# EAGLE board ButtonBreakout (EAGLE 9.5.1)
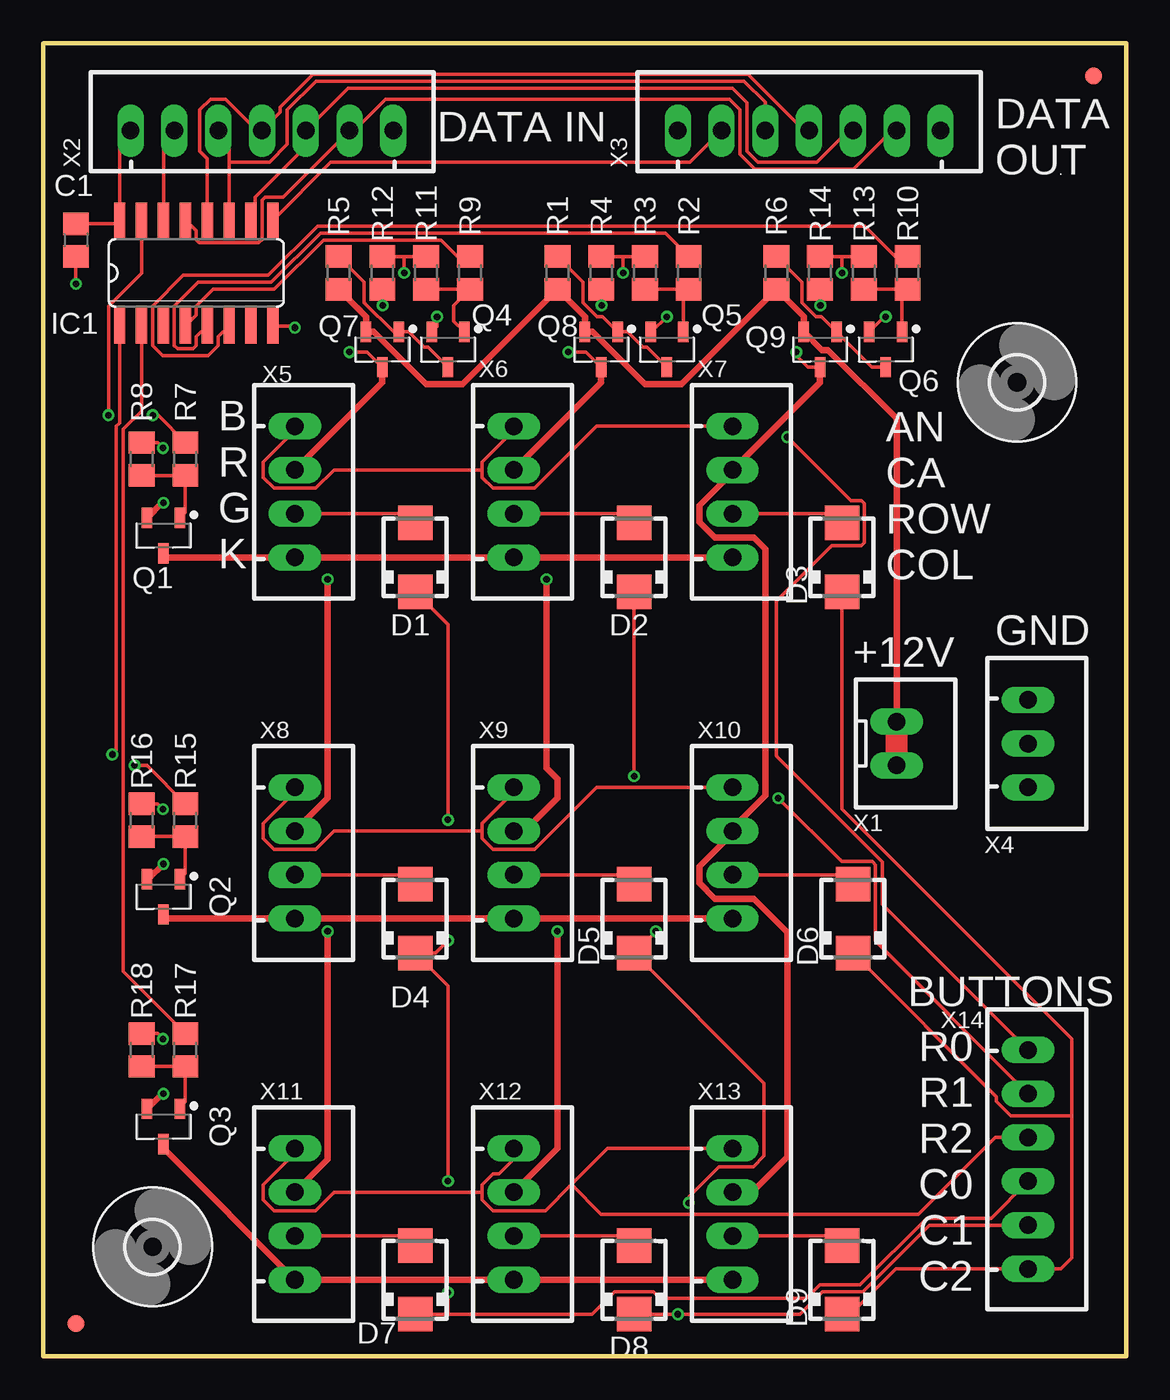
[diagram p0: board, top side]
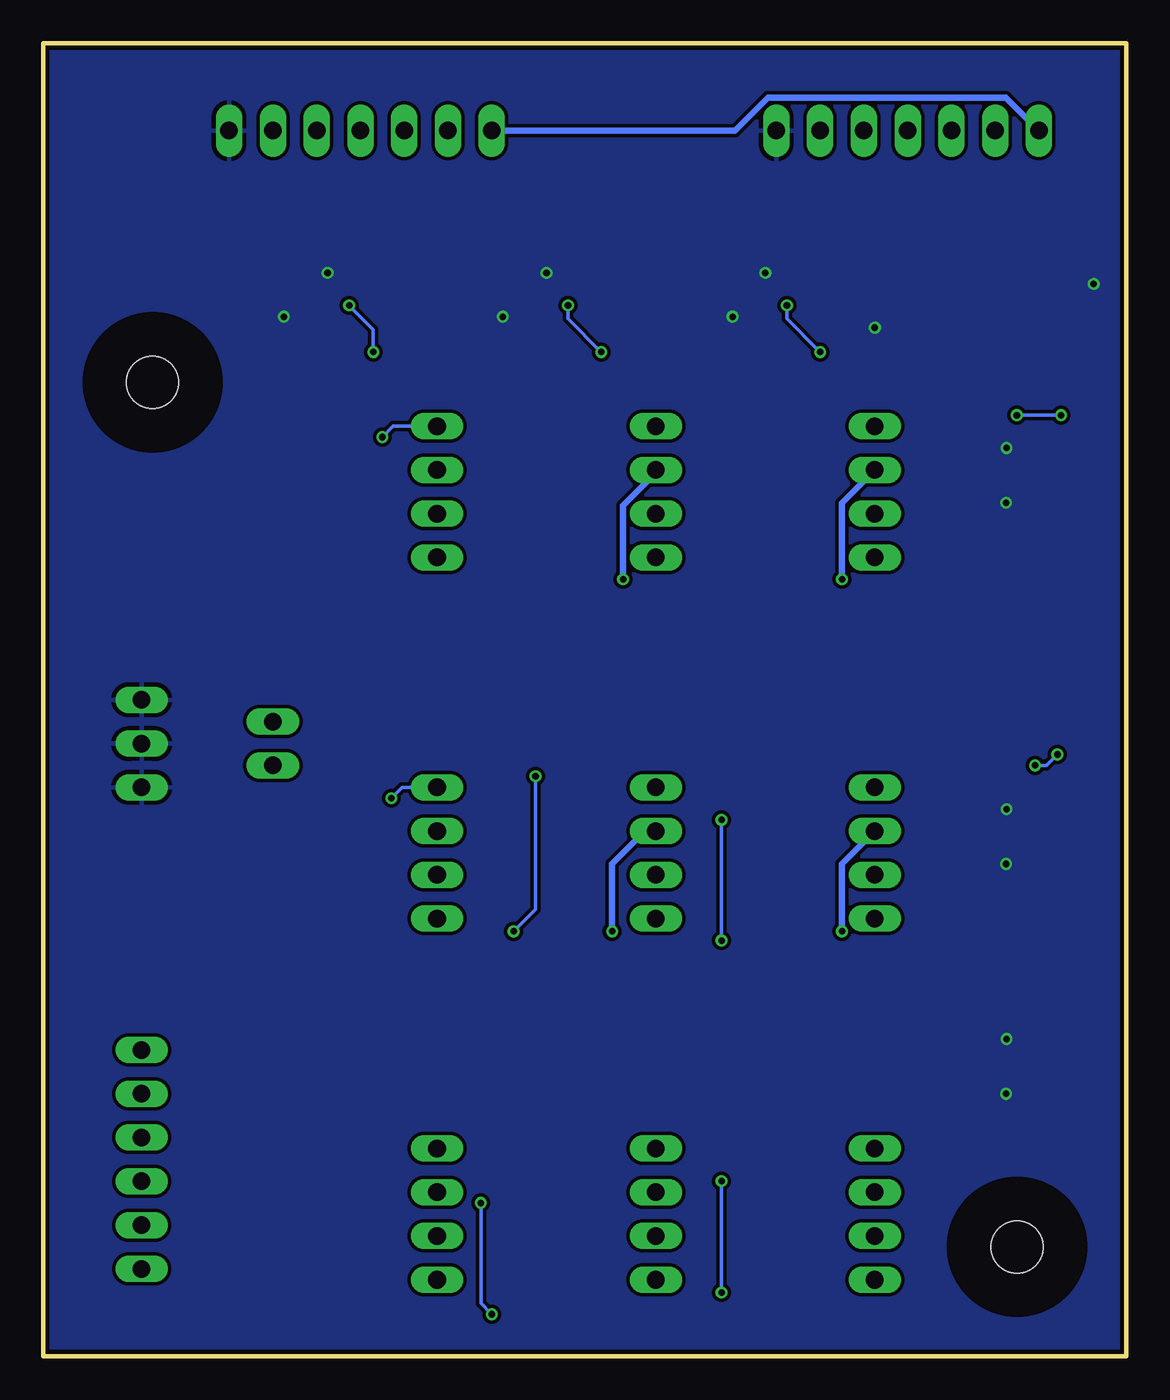
[diagram p1: board, bottom side, seen from below]

Size 62.87 x 76.2 mm. Coordinates in mm from the lower left corner, seen from the top.
Outline: 0,0 62.87,0 62.87,76.2 0,76.2 0,0
Copper layers (1*16): Top 0.035mm / dielectric 1.5mm / Bottom 0.035mm
Design rules "Dirty8TS": minimum track width 8mil, minimum drill 15mil, track to track 8mil, track to pad 8mil, pad to pad 8mil, via to via 8mil, smd to smd 0mil, copper to edge 10mil, drill to drill 10mil, minimum pad ring 10mil, minimum via ring 6mil, stop-mask expansion 2mil, vias tented up to drill 25mil, thermal gap 10mil

## Footprints (pad centres in the part's own frame; a part is rotated, then mirrored left to right if it is on the bottom)
C0805 = smd 1.3 x 1.5: 1 -0.95,0; 2 0.95,0
SMA = smd 2 x 2: A 2,0; C -2,0
FIDUCIAL_1MM = smd 1 x 1: 1 0,0
3,0 = hole 3: 0,0
SO16 = smd 0.66 x 2.032: 1 -4.445,-3.073; 2 -3.175,-3.073; 3 -1.905,-3.073; 4 -0.635,-3.073; 5 0.635,-3.073; 6 1.905,-3.073; 7 3.175,-3.073; 8 4.445,-3.073; 9 4.445,3.073; 10 3.175,3.073; 11 1.905,3.073; 12 0.635,3.073; 13 -0.635,3.073; 14 -1.905,3.073; 15 -3.175,3.073; 16 -4.445,3.073
SOT95P240X110-3N = smd 1.18 x 0.609: 1 -1.024,0.95; 2 -1.024,-0.95; 3 1.024,0
R0805 = smd 1.3 x 1.5: 1 -0.95,0; 2 0.95,0
JST-XH-02-PACKAGE-LONG-PAD = drill 1.016 long: 1 -1.27,0; 2 1.27,0
JST-XH-07-PACKAGE-LONG-PAD = drill 1.016 long: 1 -7.62,0; 2 -5.08,0; 3 -2.54,0; 4 0,0; 5 2.54,0; 6 5.08,0; 7 7.62,0
JST-XH-03-PACKAGE-LONG-PAD = drill 1.016 long: 1 -2.54,0; 2 0,0; 3 2.54,0
JST-XH-04-PACKAGE-LONG-PAD = drill 1.016 long: 1 -3.81,0; 2 -1.27,0; 3 1.27,0; 4 3.81,0
JST-XH-06-PACKAGE-LONG-PAD = drill 1.016 long: 1 -6.35,0; 2 -3.81,0; 3 -1.27,0; 4 1.27,0; 5 3.81,0; 6 6.35,0

## Placement (x,y rotation side)
C1  0.1uF  [C0805]  1.91,64.77 270 top
D1  SS34  [SMA]  21.59,46.35 90 top
D2  SS34  [SMA]  34.29,46.35 90 top
D3  SS34  [SMA]  46.35,46.35 90 top
D4  SS34  [SMA]  21.59,25.4 90 top
D5  SS34  [SMA]  34.29,25.4 90 top
D6  SS34  [SMA]  46.99,25.4 90 top
D7  SS34  [SMA]  21.59,4.45 90 top
D8  SS34  [SMA]  34.29,4.45 90 top
D9  SS34  [SMA]  46.35,4.45 90 top
F1  FIDUCIAL  [FIDUCIAL_1MM]  1.91,1.91 0 top
F2  FIDUCIAL  [FIDUCIAL_1MM]  60.96,74.3 0 top
H1  MOUNT-HOLE3.0  [3,0]  6.35,6.35 0 top
H2  MOUNT-HOLE3.0  [3,0]  56.52,56.52 0 top
IC1  74HC595D  [SO16]  8.89,62.87 0 top
Q1  AO3414SOT23  [SOT95P240X110-3N]  6.99,47.62 270 top
Q2  AO3414SOT23  [SOT95P240X110-3N]  6.99,26.67 270 top
Q3  AO3414SOT23  [SOT95P240X110-3N]  6.99,13.34 270 top
Q4  AO3414SOT23  [SOT95P240X110-3N]  23.5,58.42 270 top
Q5  AO3414SOT23  [SOT95P240X110-3N]  36.2,58.42 270 top
Q6  AO3414SOT23  [SOT95P240X110-3N]  48.9,58.42 270 top
Q7  AO3415  [SOT95P240X110-3N]  19.68,58.42 270 top
Q8  AO3415  [SOT95P240X110-3N]  32.38,58.42 270 top
Q9  AO3415  [SOT95P240X110-3N]  45.09,58.42 270 top
R1  1K  [R0805]  29.84,62.87 270 top
R2  1K  [R0805]  37.47,62.87 270 top
R3  10K  [R0805]  34.92,62.87 270 top
R4  10K  [R0805]  32.38,62.87 270 top
R5  1K  [R0805]  17.14,62.87 270 top
R6  1K  [R0805]  42.55,62.87 270 top
R7  1K  [R0805]  8.26,52.07 270 top
R8  10K  [R0805]  5.71,52.07 270 top
R9  1K  [R0805]  24.77,62.87 270 top
R10  1K  [R0805]  50.16,62.87 270 top
R11  10K  [R0805]  22.23,62.87 270 top
R12  10K  [R0805]  19.68,62.87 270 top
R13  10K  [R0805]  47.62,62.87 270 top
R14  10K  [R0805]  45.09,62.87 270 top
R15  1K  [R0805]  8.26,31.11 270 top
R16  10K  [R0805]  5.71,31.11 270 top
R17  1K  [R0805]  8.26,17.78 270 top
R18  10K  [R0805]  5.71,17.78 270 top
X1  JST-XH-02-PIN-LONG-PAD  [JST-XH-02-PACKAGE-LONG-PAD]  49.53,35.56 270 top
X2  JST-XH-07-PIN-LONG-PAD  [JST-XH-07-PACKAGE-LONG-PAD]  12.7,71.12 0 top
X3  JST-XH-07-PIN-LONG-PAD  [JST-XH-07-PACKAGE-LONG-PAD]  44.45,71.12 0 top
X4  JST-XH-03-PIN-LONG-PAD  [JST-XH-03-PACKAGE-LONG-PAD]  57.15,35.56 270 top
X5  JST-XH-04-PIN-LONG-PAD  [JST-XH-04-PACKAGE-LONG-PAD]  14.61,50.16 270 top
X6  JST-XH-04-PIN-LONG-PAD  [JST-XH-04-PACKAGE-LONG-PAD]  27.3,50.16 270 top
X7  JST-XH-04-PIN-LONG-PAD  [JST-XH-04-PACKAGE-LONG-PAD]  40.01,50.16 270 top
X8  JST-XH-04-PIN-LONG-PAD  [JST-XH-04-PACKAGE-LONG-PAD]  14.61,29.21 270 top
X9  JST-XH-04-PIN-LONG-PAD  [JST-XH-04-PACKAGE-LONG-PAD]  27.3,29.21 270 top
X10  JST-XH-04-PIN-LONG-PAD  [JST-XH-04-PACKAGE-LONG-PAD]  40.01,29.21 270 top
X11  JST-XH-04-PIN-LONG-PAD  [JST-XH-04-PACKAGE-LONG-PAD]  14.61,8.26 270 top
X12  JST-XH-04-PIN-LONG-PAD  [JST-XH-04-PACKAGE-LONG-PAD]  27.3,8.26 270 top
X13  JST-XH-04-PIN-LONG-PAD  [JST-XH-04-PACKAGE-LONG-PAD]  40.01,8.26 270 top
X14  JST-XH-06-PIN-LONG-PAD  [JST-XH-06-PACKAGE-LONG-PAD]  57.15,11.43 270 top

## Library data of the parts
C1 = rcl; SPICEPREFIX: C
D1-D9 Q1-Q9 = tmc
F1 F2 = ECE388
H1 H2 = holes
IC1 = 74xx-eu
R1-R18 = rcl; SPICEPREFIX: R
X1-X14 = Rembrandt Electronics - JST XH Connectors v1-0

## Nets
+5V: C1.1 IC1.16 X2.1 X3.1
+12V: Q7.2 Q8.2 Q9.2 R1.2 R5.2 R6.2 X1.1 X1.2
ANODE0: Q7.3 R12.2 X5.2 X8.2 X11.2
ANODE1: Q8.3 R4.2 X6.2 X9.2 X12.2
ANODE2: Q9.3 R14.2 X7.2 X10.2 X13.2
B_COL0: D1.C D4.C D7.C X14.4
B_COL1: D2.C D5.C D8.C X14.5
B_COL2: D3.C D6.C D9.C X14.6
B_ROW0: X5.1 X6.1 X7.1 X14.1
B_ROW1: X8.1 X9.1 X10.1 X14.2
B_ROW2: X11.1 X12.1 X13.1 X14.3
BLANK: IC1.10 X2.5 X3.5
CATHODE0: Q1.3 X5.4 X6.4 X7.4
CATHODE1: Q2.3 X8.4 X9.4 X10.4
CATHODE2: Q3.3 X11.4 X12.4 X13.4
CLOCK: IC1.11 X2.3 X3.3
DATA_IN: IC1.14 X2.2
DATA_OUT: IC1.9 X3.2
GND: C1.2 IC1.8 Q1.2 Q2.2 Q3.2 Q4.2 Q5.2 Q6.2 R3.1 R4.1 R8.1 R11.1 R12.1 R13.1 R14.1 R16.1 R18.1 X2.7 X3.7 X4.1 X4.2 X4.3
LATCH: IC1.12 X2.4 X3.4
LCOL0: IC1.4 R9.1
LCOL1: IC1.5 R2.1
LCOL2: IC1.6 R10.1
LROW0: IC1.15 R7.1
LROW1: IC1.1 R15.1
LROW2: IC1.2 R17.1
N$1: Q2.1 R15.2 R16.2
N$2: Q3.1 R17.2 R18.2
N$3: Q5.3 Q8.1 R1.1
N$4: Q5.1 R2.2 R3.2
N$5: Q1.1 R7.2 R8.2
N$6: Q4.3 Q7.1 R5.1
N$7: D1.A X5.3
N$8: D2.A X6.3
N$9: D3.A X7.3
N$10: D4.A X8.3
N$11: D5.A X9.3
N$12: D6.A X10.3
N$13: D7.A X11.3
N$14: D8.A X12.3
N$15: D9.A X13.3
N$16: Q4.1 R9.2 R11.2
N$17: Q6.3 Q9.1 R6.1
N$18: Q6.1 R10.2 R13.2
OEN: IC1.13 X2.6 X3.6

## Tracks (layer width: path | path; a pad name or v marks a point on that pad's centre or on a via)
+5V
  Top 0.203: X2.1 4.45,70.48 IC1.16 4.23,65.72 C1.1
  Bottom 0.381: X3.1 22.72,71.12 22.15,71.68 20.8,73.04 7,73.04 X2.1
+12V
  Top 0.381: R5.2 18.73,60.33 Q7.2 19.18,59.44 22.22,56.41 24.34,56.41 R1.2 31.43,60.33 Q8.2 31.88,59.44 34.92,56.41 37.04,56.41 R6.2 44.13,60.33 Q9.2 45.2,58.38 45.55,58.38 49.53,54.4 X1.1
  Top 1.27: X1.2 X1.1
ANODE0  (via drill 0.38)
  Top 0.203: v19.7,60.98 19.68,61 R12.2 | Q7.3 18.81,58.27 v17.78,58.27
  Top 0.381: v16.51,45.09 16.51,33.51 16.52,33.5 16.52,32.4 X8.2 | v16.51,24.66 16.51,12.56 16.52,12.54 16.52,11.44 X11.2 | Q7.3 19.68,56.52 X5.2
  Bottom 0.203: v17.78,58.27 19.7,60.2 v19.7,60.98
  Bottom 0.381: v16.51,45.09 16.51,45.86 16.52,45.88 16.52,49.52 X5.2 | v16.51,24.66 16.51,24.91 16.52,24.92 16.52,28.56 X8.2
ANODE1  (via drill 0.38)
  Top 0.203: v32.41,60.98 32.38,61 R4.2 | Q8.3 31.51,58.27 v30.48,58.27
  Top 0.381: v29.21,45.09 29.21,34.15 29.86,33.5 29.86,32.4 27.94,30.48 X9.2 | v29.84,24.66 29.84,12.56 29.86,12.54 29.86,12.08 X12.2 | Q8.3 32.38,56.52 X6.2
  Bottom 0.203: v30.48,58.27 32.41,60.2 v32.41,60.98
  Bottom 0.381: X6.2 27.3,51.29 29.22,49.37 29.22,45.88 29.21,45.86 v29.21,45.09 | v29.84,24.66 29.86,24.68 29.86,28.56 27.94,30.48 X9.2
ANODE2  (via drill 0.38)
  Top 0.203: v45.1,60.98 45.09,61 R14.2 | Q9.3 44.37,57.4 43.7,58.07 v43.7,58.27
  Top 0.381: X13.2 41.13,9.53 43.19,11.59 43.19,24.61 41.25,26.56 38.99,26.56 38.09,27.46 38.09,28.42 40.01,30.34 X10.2 40.01,30.62 41.92,32.54 41.92,46.83 41.25,47.51 38.99,47.51 38.09,48.42 38.09,49.37 40.01,51.29 X7.2 45.09,56.52 Q9.3
  Bottom 0.203: v43.7,58.27 43.7,59.58 v45.1,60.98
B_COL0  (via drill 0.38)
  Top 0.203: X14.4 55.02,8.03 51.27,8.03 47.4,4.16 45.06,4.16 44.28,3.38 35.79,3.38 35.42,3.75 33.16,3.75 31.86,2.44 23.5,2.44 | 23.5,2.44 D7.C | v23.5,10.17 23.5,21.5 D4.C 22.77,23.4 v23.5,24.13 | v23.5,3.71 23.5,2.44 | D1.C 23.5,42.45 v23.5,31.13
  Bottom 0.203: v23.5,10.17 v23.5,3.71 | v23.5,31.13 v23.5,24.13
B_COL1  (via drill 0.38)
  Top 0.203: X14.5 51.44,7.62 47.56,3.75 45.23,3.75 43.92,2.44 v36.83,2.44 D8.C | v37.47,8.9 37.47,9.26 39.21,11 41.21,11 41.83,11.62 41.83,15.86 D5.C v35.56,24.66 | D2.C v34.29,33.67
  Bottom 0.203: v37.47,8.9 37.47,3.08 v36.83,2.44 | v34.29,33.67 34.29,25.93 v35.56,24.66
B_COL2
  Top 0.203: D9.C 46.84,2.44 49.48,5.08 X14.6 59.05,5.08 59.69,5.71 59.69,13.97 | D3.C 46.35,31.75 59.69,18.41 59.69,13.97 | D6.C 55.32,15.07 55.32,14.8 56.15,13.97 59.69,13.97
B_ROW0  (via drill 0.38)
  Top 0.203: 25.48,51.44 25.48,50.99 26.1,50.37 28.51,50.37 32.12,53.98 X7.1 | 25.48,51.44 25.48,51.88 27.3,53.71 X6.1 | X5.1 14.61,53.71 12.78,51.88 12.78,50.99 13.4,50.37 15.81,50.37 16.88,51.44 25.48,51.44 | X14.1 48.7,26.23 48.7,28.7 42.55,34.85 42.55,43.81 45.78,47.05 47.48,47.05 47.66,47.23 47.66,49.48 47.48,49.66 46.86,49.66 v43.18,53.34
  Bottom 0.203: X7.1 42.55,53.98 v43.18,53.34
B_ROW1  (via drill 0.38)
  Top 0.203: X10.1 32.12,33.02 28.51,29.41 26.1,29.41 25.48,30.04 25.48,30.48 | X8.1 14.61,32.75 12.78,30.92 12.78,30.04 13.4,29.41 15.81,29.41 16.88,30.48 25.48,30.48 | 25.48,30.48 25.48,30.92 27.3,32.75 X9.1 | X14.2 48.3,24.09 48.3,28.53 48.12,28.7 46.34,28.7 v42.66,32.38
  Bottom 0.203: X10.1 42.02,33.02 v42.66,32.38
B_ROW2
  Top 0.203: X13.1 32.75,12.06 30.66,9.98 | 30.66,9.98 29.14,8.46 26.1,8.46 25.48,9.08 25.48,9.53 | X11.1 14.61,11.8 12.78,9.97 12.78,9.08 13.4,8.46 15.81,8.46 16.88,9.53 25.48,9.53 | 25.48,9.53 25.48,9.97 26.1,10.59 26.47,10.59 27.3,11.43 X12.1 | 30.66,9.98 32.38,8.26 50.8,8.26 55.24,12.7 X14.3
BLANK
  Top 0.203: IC1.10 12.29,66.17 12.29,67.25 15.24,70.19 X2.5 17.7,73.58 40.01,73.58 40.84,72.75 40.84,69.92 41.47,69.29 44.89,69.29 46.72,71.12 X3.5
CATHODE0
  Top 0.381: X7.4 X6.4 X5.4 7.23,46.35 Q1.3
CATHODE1
  Top 0.203: Q2.3 6.99,25.57 7.16,25.4
  Top 0.381: X10.4 X9.4 X8.4 7.16,25.4
CATHODE2
  Top 0.203: Q3.3 6.99,12.06
  Top 0.381: X13.4 X12.4 X11.4 6.99,12.06
CLOCK
  Top 0.203: X2.3 10.79,70.48 10.79,69.22 | 10.79,69.22 IC1.11 | 10.79,69.22 10.87,69.29 13.14,69.29 14.17,70.32 14.17,72.32 15.84,73.99 40.67,73.99 41.91,72.76 X3.3
DATA_IN
  Top 0.203: X2.2 6.99,70.48 IC1.14
DATA_OUT
  Top 0.203: IC1.9 16.69,69.29 37.54,69.29 X3.2
GND  (via drill 0.38)
  Top 0.203: R11.1 20.95,63.81 | 20.95,63.81 R12.1 | 20.95,63.81 v20.95,62.87 | R3.1 33.66,63.81 | 33.66,63.81 R4.1 | 33.66,63.81 v33.66,62.87 | R14.1 46.35,63.81 | 46.35,63.81 R13.1 | 46.35,63.81 v46.35,62.87 | R8.1 6.64,53.02 v6.96,52.7 | C1.2 v1.91,62.23 | IC1.8 14.5,59.79 v14.61,59.69 | R16.1 6.64,32.06 v6.96,31.75 | R18.1 6.64,18.73 v6.96,18.41 | Q4.2 22.86,59.76 v22.86,60.33 | Q5.2 35.31,59.44 v36.2,60.33 | Q6.2 48.83,60.33 v48.9,60.33
  Top 0.381: Q3.2 6.92,15.24 v6.99,15.24 | Q2.2 6.1,27.7 v6.99,28.57 | Q1.2 6.92,49.53 v6.99,49.53
  pour Bottom: 0,76.2 62.87,76.2 62.87,0 0,0
LATCH
  Top 0.203: IC1.12 9.53,69.48 9.09,69.92 9.09,72.32 9.72,72.95 10.6,72.95 12.43,71.12 X2.4 13.77,72.19 13.77,72.49 15.67,74.4 40.9,74.4 44.18,71.12 X3.4
LCOL0
  Top 0.203: IC1.4 8.89,60.43 8.89,60.93 9.87,61.91 13.41,61.91 16.27,64.77 23.1,64.77 24.06,63.81 R9.1
LCOL1
  Top 0.203: IC1.5 8.89,59.16 8.89,58.65 8.71,58.47 7.8,58.47 7.62,58.65 7.62,60.93 9,62.32 13.24,62.32 16.1,65.18 36.1,65.18 R2.1
LCOL2
  Top 0.203: R10.1 49.46,63.81 47.69,65.58 15.93,65.58 13.07,62.72 8.14,62.72 6.35,60.93 6.35,58.65 6.93,58.06 9.57,58.06 10.16,58.65 10.16,59.16 IC1.6
LROW0  (via drill 0.38)
  Top 0.203: IC1.15 5.71,62.84 3.81,60.93 3.81,54.62 v3.8,54.61 | v6.36,54.61 6.67,54.61 R7.1
  Bottom 0.203: v3.8,54.61 v6.36,54.61
LROW1  (via drill 0.38)
  Top 0.203: IC1.1 4.45,54.16 4.25,53.97 4.25,35.17 v4.01,34.92 | v5.31,34.29 6.03,34.29 R15.1
  Bottom 0.203: v4.01,34.92 4.65,34.29 v5.31,34.29
LROW2
  Top 0.203: IC1.2 5.71,54.85 4.66,53.8 4.66,22.32 R17.1
N$1
  Top 0.203: R16.2 R15.2 8.26,28.02 Q2.1
N$2
  Top 0.203: R18.2 R17.2 8.26,14.76 7.93,14.44 Q3.1
N$3
  Top 0.203: R1.1 31.33,62.33 31.33,61.14 32.14,60.33 32.45,60.33 Q8.1 33.92,59.44 34.81,58.55 35.04,58.55 Q5.3
N$4
  Top 0.203: R3.2 R2.2 37.15,61.59 Q5.1
N$5
  Top 0.203: R8.2 R7.2 8.26,48.97 Q1.1
N$6
  Top 0.203: R5.1 18.63,62.33 18.63,61.14 20.32,59.44 Q7.1 21.22,59.44 22.11,58.55 22.34,58.55 Q4.3
N$7
  Top 0.203: X5.3 21.05,48.9 D1.A
N$8
  Top 0.203: D2.A 33.75,48.9 X6.3
N$9
  Top 0.203: X7.3 45.81,48.9 D3.A
N$10
  Top 0.203: X8.3 21.05,27.94 D4.A
N$11
  Top 0.203: X9.3 33.75,27.94 D5.A
N$12
  Top 0.203: X10.3 46.45,27.94 D6.A
N$13
  Top 0.203: X11.3 21.05,6.99 D7.A
N$14
  Top 0.203: D8.A 33.75,6.99 X12.3
N$15
  Top 0.203: D9.A 45.81,6.99 X13.3
N$16
  Top 0.203: R11.2 R9.2 23.81,60.96 23.81,60.08 Q4.1
N$17
  Top 0.203: R6.1 44.03,62.33 44.03,61.14 44.84,60.33 45.15,60.33 Q9.1 48.08,57.4 Q6.3
N$18
  Top 0.203: R13.2 R10.2 49.84,61.59 Q6.1
OEN
  Top 0.203: IC1.13 8.89,65.3 8.89,64.8 9.07,64.62 12.52,64.62 12.7,64.8 12.7,67.08 12.88,67.26 13.92,67.26 X2.6 18.05,71.12 19.88,72.95 39.81,72.95 40.44,72.32 40.44,69.75 41.3,68.89 47.02,68.89 49.26,71.12 X3.6

## Text on the board
tNames: DATA IN | DATA / OUT | B / R / G / K | AN / CA / ROW / COL | GND | +12V | BUTTONS
_tsilk: R0 / R1 / R2 / C0 / C1 / C2